# EAGLE board dev_kit_f103v4 (EAGLE 9.6.2)
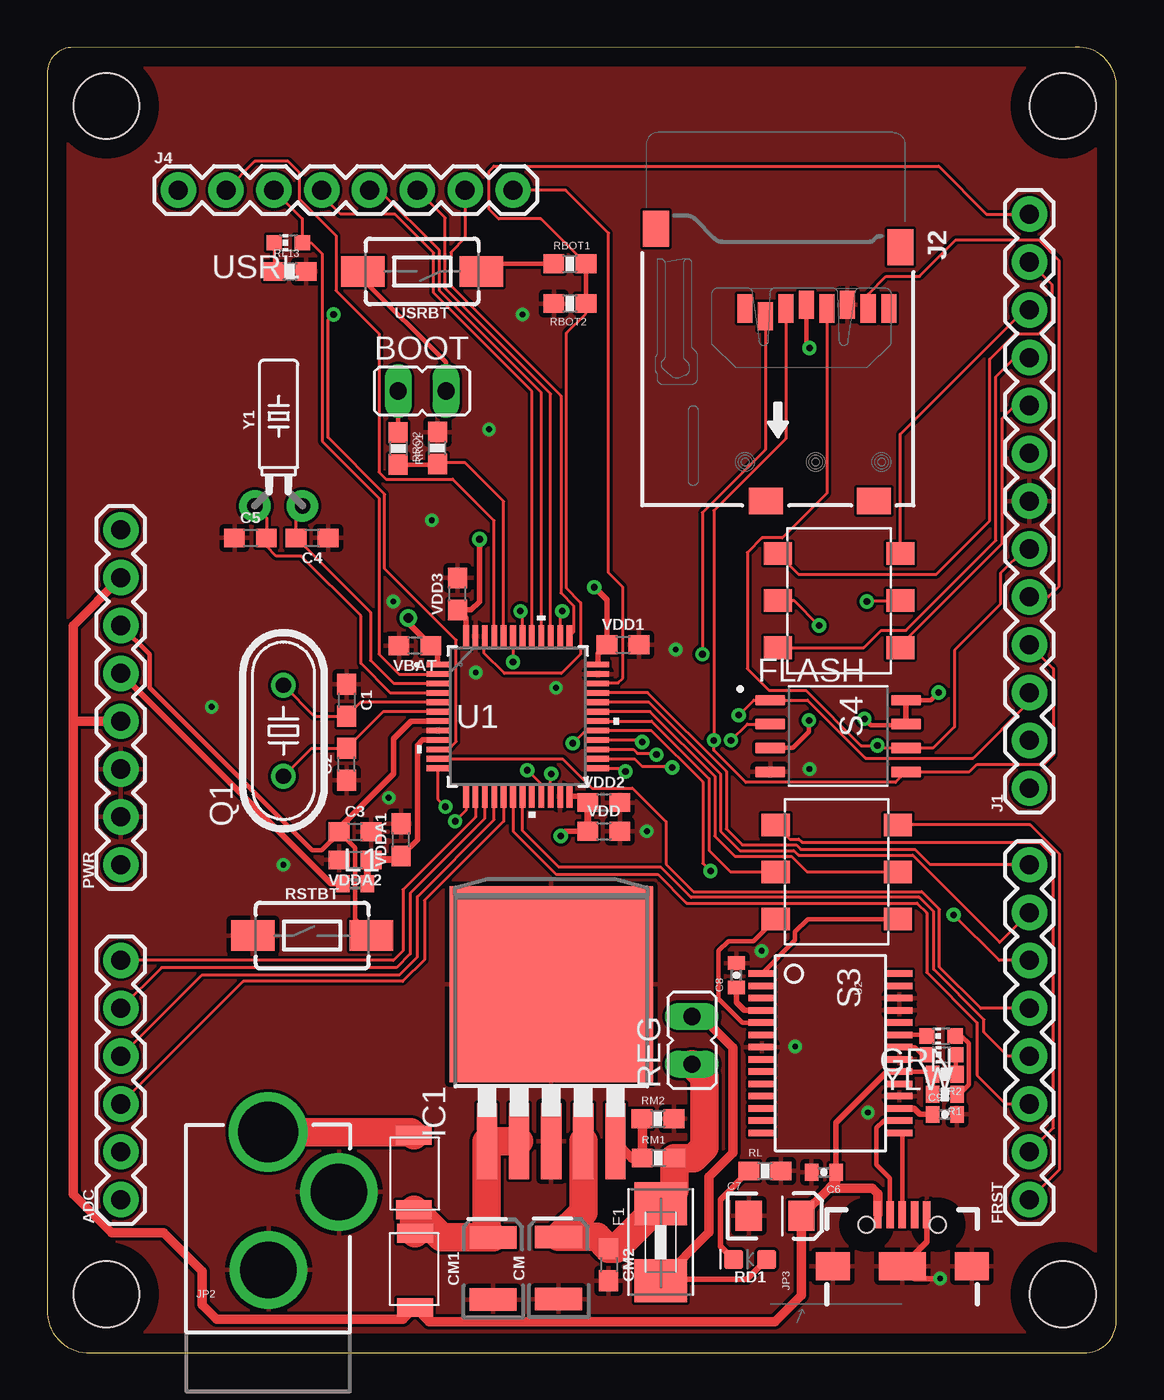
[diagram p0: board, top side]
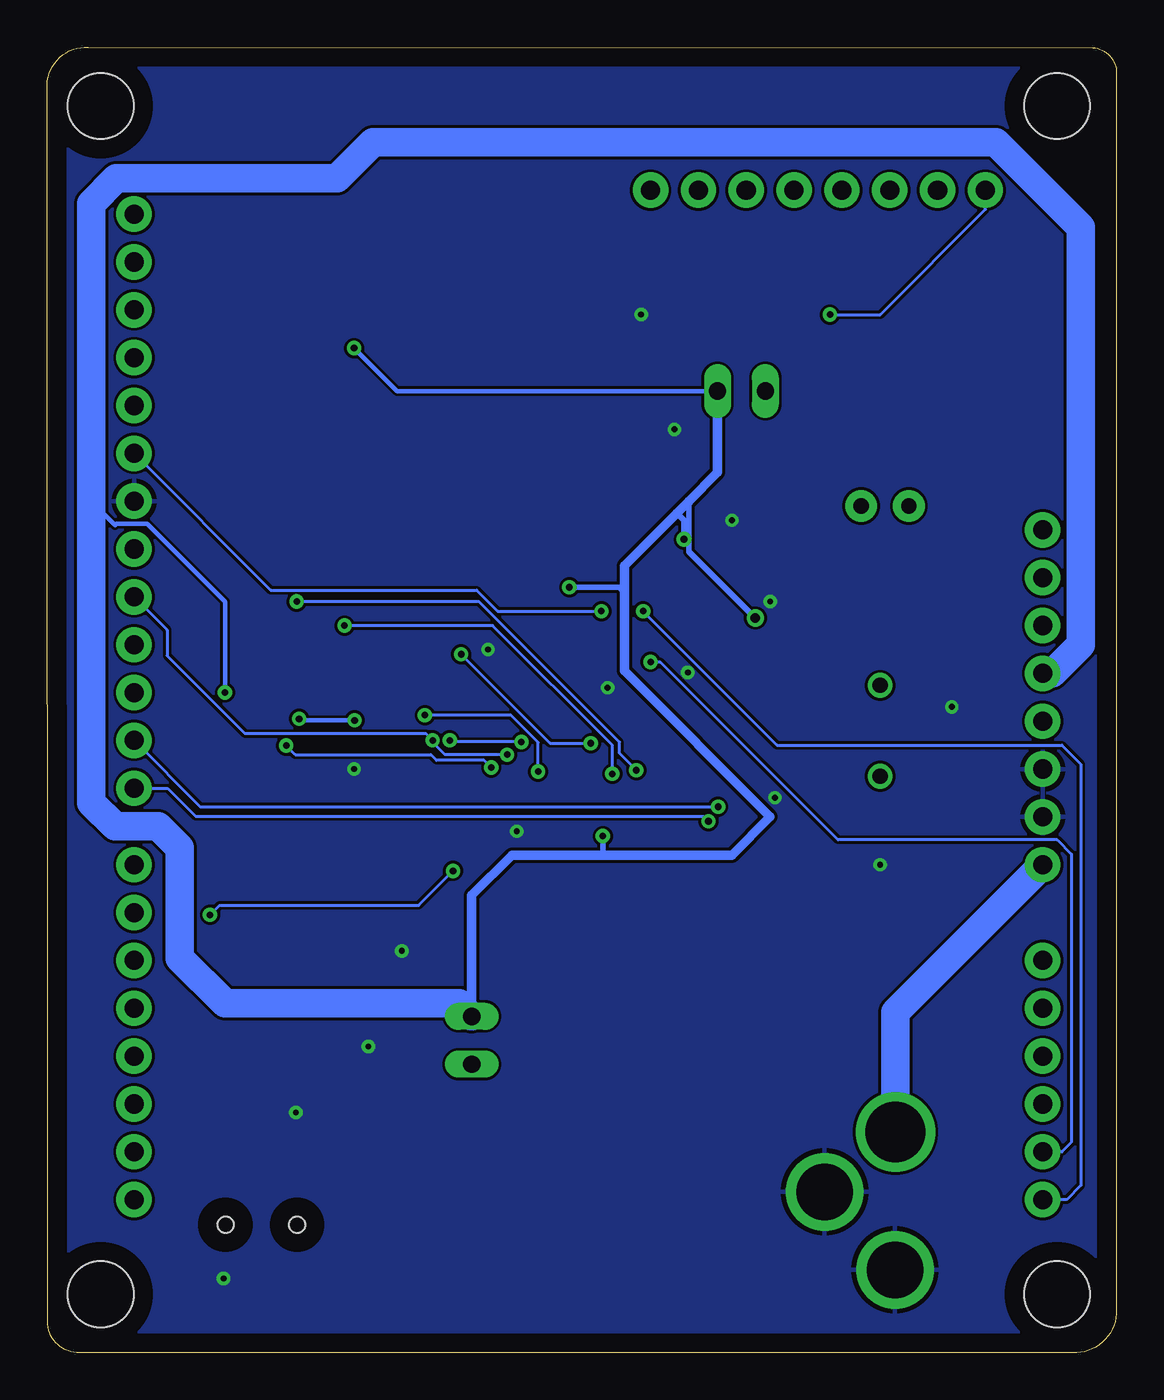
[diagram p1: board, bottom side, seen from below]

Size 56.8 x 69.33 mm. Coordinates in mm from the lower left corner, seen from the top.
Outline: 54.62,69.33 1.25,69.3 arc90 0.01,67.8 0.01,2.29 arc90 2.12,0.01 54.92,0.01 arc90 56.78,1.52 56.8,67.33 arc90 54.62,69.33
Copper layers (1*16): Top 0.035mm / dielectric 1.5mm / Bottom 0.035mm
Design rules "default": minimum track width 6mil, minimum drill 0.35mm, track to track 6mil, track to pad 6mil, pad to pad 6mil, via to via 6mil, smd to smd 6mil, copper to edge 40mil, drill to drill 6mil, minimum pad ring 10mil, minimum via ring 8mil, stop-mask expansion 4mil, vias tented up to drill 0mil, thermal gap 10mil
Net classes: 1 power: width 0.254 mm
Holes 3.5 mm at 53.96,3.11 3.16,3.11 3.16,66.2 53.96,66.2

## Footprints (pad centres in the part's own frame; a part is rotated, then mirrored left to right if it is on the bottom)
1X06 = drill 1.016 pad 1.88: 1 0,0; 2 2.54,0; 3 5.08,0; 4 7.62,0; 5 10.16,0; 6 12.7,0
JP1 = drill 0.914 long: 1 0,-1.27; 2 0,1.27
0603 = smd 1.1 x 1: 1 -0.85,0; 2 0.85,0
0402-CAP = smd 0.7 x 0.9: 1 -0.65,0; 2 0.65,0
EIA3216 = smd 1.4 x 1.6: A 1.4,0; C -1.4,0
EIA3528 = smd 1.2 x 2.5: A 1.65,0; C -1.65,0
3ASCHOOTKY = smd 1 x 1.9: IN 0.446,-1.325; OUT 4.396,-1.325
1812 = smd 2.286 x 2.794: 1 -2.046,0; 2 2.046,0
W25Q64 = smd 1.61 x 0.58: CLK 3.605,-0.635; CS -3.605,1.905; DI 3.605,-1.905; DO -3.605,0.635; GND -3.605,-1.905; H/R 3.605,0.635; VCC 3.605,1.905; WP -3.605,-0.635
1X08 = drill 1.016 pad 1.88: 1 0,0; 2 2.54,0; 3 5.08,0; 4 7.62,0; 5 10.16,0; 6 12.7,0; 7 15.24,0; 8 17.78,0
CHIP-LED0603 = smd 0.8 x 0.8: A 0,-0.75; C 0,0.75
TO263-5 = smd 1.067 x 4.039: 1 -3.404,-5.791; 2 -1.702,-5.791; 3 0,-5.791; 4 1.702,-5.791; 5 3.404,-5.791 | smd 10.8 x 10.41: 6 0,2.54
1X13 = drill 1.016 pad 1.88: 1 0,0; 2 2.54,0; 3 5.08,0; 4 7.62,0; 5 10.16,0; 6 12.7,0; 7 15.24,0; 8 17.78,0; 9 20.32,0; 10 22.86,0; 11 25.4,0; 12 27.94,0; 13 30.48,0
CON-SD-CARD_2908-05 = smd 0.8 x 1.5: 1 1.761,3.847; 2 0.669,4.253; 3 -0.423,3.847; 4 -1.515,3.644; 5 -2.607,3.847; 6 -3.7,3.644; 7 -4.792,3.847; 8 -5.884,3.847 | smd 1.397 x 1.905: GND@1 -6.5,0.6; GND@2 6.473,-0.389 | smd 1.803 x 1.397: GND@3 0.631,14.059; GND@4 -5.084,14.059
POWER_JACK_PTH_LOCK = drill 2.997 pad 4.115: GND 0.025,6.557; GNDBREAK 3.762,10.7 | drill 3.2 pad 4.115: PWR 0,13.878
USB-B-MICRO-SMD_V03 = smd 1.45 x 0.4: D+1 2.725,0; D-1 2.725,0.65; GND1 2.725,-1.3; ID1 2.725,-0.65; VBUS1 2.725,1.3 | smd 1.5 x 1.8: SHIELD1 0,3.685; SHIELD2 0,-3.685 | smd 1.5 x 2.5: SHIELD3 0,0 | hole 0.85: 2.2,1.9; 2.2,-1.9
0402 = smd 0.7 x 0.9: 1 -0.65,0; 2 0.65,0
HC49/S = drill 0.813: 1 -2.413,0; 2 2.413,0
0402-RES = smd 0.7 x 0.9: 1 -0.65,0; 2 0.65,0
0603-RES = smd 1.1 x 1: 1 -0.85,0; 2 0.85,0
LED-0603 = smd 1 x 1: A -0.877,0; C 0.877,0
TACTILE_SWITCH_SMD_6.0X3.5MM = smd 2.3 x 1.6: 1 -3.15,0; 2 3.15,0
452403012014 = smd 1.2 x 1.5: 1 -2.5,3.25; 2 0,3.25; 3 2.5,3.25; 4 -2.5,-3.25; 5 0,-3.25; 6 2.5,-3.25
LQFP48-7X7MM = smd 1.194 x 0.305: 1 -4.25,2.75; 2 -4.25,2.25; 3 -4.25,1.75; 4 -4.25,1.25; 5 -4.25,0.75; 6 -4.25,0.25; 7 -4.25,-0.25; 8 -4.25,-0.75; 9 -4.25,-1.25; 10 -4.25,-1.75; 11 -4.25,-2.25; 12 -4.25,-2.75; 25 4.25,-2.75; 26 4.25,-2.25; 27 4.25,-1.75; 28 4.25,-1.25; 29 4.25,-0.75; 30 4.25,-0.25; 31 4.25,0.25; 32 4.25,0.75; 33 4.25,1.25; 34 4.25,1.75; 35 4.25,2.25; 36 4.25,2.75 | smd 0.305 x 1.194: 13 -2.75,-4.25; 14 -2.25,-4.25; 15 -1.75,-4.25; 16 -1.25,-4.25; 17 -0.75,-4.25; 18 -0.25,-4.25; 19 0.25,-4.25; 20 0.75,-4.25; 21 1.25,-4.25; 22 1.75,-4.25; 23 2.25,-4.25; 24 2.75,-4.25; 37 2.75,4.25; 38 2.25,4.25; 39 1.75,4.25; 40 1.25,4.25; 41 0.75,4.25; 42 0.25,4.25; 43 -0.25,4.25; 44 -0.75,4.25; 45 -1.25,4.25; 46 -1.75,4.25; 47 -2.25,4.25; 48 -2.75,4.25
SSOP28DB = smd 0.348 x 1.397: 1 -4.225,-3.656; 2 -3.575,-3.656; 3 -2.925,-3.656; 4 -2.275,-3.656; 5 -1.625,-3.656; 6 -0.975,-3.656; 7 -0.325,-3.656; 8 0.325,-3.656; 9 0.975,-3.656; 10 1.625,-3.656; 11 2.275,-3.656; 12 2.925,-3.656; 13 3.575,-3.656; 14 4.225,-3.656; 15 4.225,3.656; 16 3.575,3.656; 17 2.925,3.656; 18 2.275,3.656; 19 1.625,3.656; 20 0.975,3.656; 21 0.325,3.656; 22 -0.325,3.656; 23 -0.975,3.656; 24 -1.625,3.656; 25 -2.275,3.656; 26 -2.925,3.656; 27 -3.575,3.656; 28 -4.225,3.656
CRYSTAL-PTH-2X6-CYL-KIT = drill 0.813 pad 1.676: 1 -1.27,0; 2 1.27,0

## Placement (x,y rotation side)
ADC  [1X06]  3.92,8.14 90 top
BOOT  [JP1]  19.92,51.06 270 top
C1  22pF  [0603]  15.91,34.65 270 top
C2  22pF  [0603]  15.91,31.25 90 top
C3  0.1uF  [0603]  16.36,27.67 0 top
C4  15pF  [0603]  14.08,43.27 180 top
C5  15pF  [0603]  10.8,43.27 0 top
C6  0.1uF  [0402-CAP]  41.26,9.59 180 top
C7  10uF  [EIA3216]  38.67,7.27 0 top
C8  0.1uF  [0402-CAP]  36.61,20.05 90 top
C9  0.1uF  [0402-CAP]  47.68,12.66 0 top
CM  10uF  [EIA3528]  27.16,4.51 90 top
CM1  10uF  [EIA3528]  23.68,4.48 90 top
CM2  100nF  [0603]  29.83,4.68 270 top
D1  [3ASCHOOTKY]  18.22,1.97 90 top
D2  [3ASCHOOTKY]  20.81,12 270 top
F1  [1812]  32.59,5.88 270 top
FLASH  [W25Q64]  42.02,32.75 0 top
FRST  [1X08]  52.18,8.14 90 top
GRN  [CHIP-LED0603]  47.48,16.82 90 top
IC1  [TO263-5]  26.78,17.03 0 top
J1  [1X13]  52.18,29.98 90 top
J2  CON-SD-CARD_MICROSD-2908-05  [CON-SD-CARD_2908-05]  38.82,59.29 180 top
J4  [1X08]  6.97,61.73 0 top
JP2  POWER  [POWER_JACK_PTH_LOCK]  11.74,-2.15 0 top
JP3  USB  [USB-B-MICRO-SMD_V03]  45.42,4.61 90 top
L1  BLM15HB221SN1  [0402]  16.36,24.9 0 top
PWR  [1X08]  3.92,25.92 90 top
Q1  [HC49/S]  12.55,33.03 90 top
R1  1k  [0402-RES]  47.68,13.73 180 top
R2  1k  [0402-RES]  47.68,14.79 180 top
RBOT1  330  [0603-RES]  27.77,57.82 0 top
RBOT2  10k  [0603-RES]  27.77,55.71 180 top
RD1  Red  [LED-0603]  37.34,4.96 180 top
REG  [JP1]  34.25,16.6 0 top
RL  1.5k  [0603-RES]  38.13,9.66 0 top
RL13  1k5  [0603-RES]  12.91,57.41 0 top
RM1  316  [0603-RES]  32.47,10.35 0 top
RM2  187  [0603-RES]  32.44,12.43 0 top
RRO1  10k  [0603-RES]  20.73,48.04 90 top
RRO2  330  [0603-RES]  18.65,48.02 270 top
RSTBT  MOMENTARY-SWITCH-SPST-SMD-6.0X3.5MM  [TACTILE_SWITCH_SMD_6.0X3.5MM]  14.08,22.16 0 top
S3  [452403012014]  41.94,25.54 270 top
S4  [452403012014]  42.07,39.94 270 top
U1  [LQFP48-7X7MM]  25,33.79 0 top
U2  FT232RLSSOP  [SSOP28DB]  41.61,15.91 270 top
USRBT  MOMENTARY-SWITCH-SPST-SMD-6.0X3.5MM  [TACTILE_SWITCH_SMD_6.0X3.5MM]  19.92,57.41 180 top
USRL  [CHIP-LED0603]  12.81,58.94 90 top
VBAT  100nF  [0603]  19.54,37.55 180 top
VDD  4.7uF  [0603]  29.57,27.7 0 top
VDD1  100nF  [0603]  30.59,37.6 0 top
VDD2  100nF  [0603]  29.57,29.22 0 top
VDD3  100nF  [0603]  21.8,40.29 90 top
VDDA1  1uF  [0603]  18.8,27.24 90 top
VDDA2  100nF  [0603]  16.36,26.17 180 top
Y1  32.768kHz  [CRYSTAL-PTH-2X6-CYL-KIT]  12.3,44.97 0 top
YLW  [CHIP-LED0603]  47.5,15.83 90 top

## Library data of the parts
ADC = SparkFun-Connectors; PROD_ID: CONN-08437
BOOT REG = jumper
C1-C5 = SparkFun-Capacitors; PROD_ID: CAP-07876
C6-C9 R1 R2 U2 = SparkFun
CM CM1 = SparkFun-Capacitors; PROD_ID: CAP-08063
CM2 VBAT VDD VDD1-VDD3 VDDA1 VDDA2 = SparkFun-Capacitors; PROD_ID: CAP-00810
D1 D2 = 1N4007
F1 GRN USRL YLW = adafruit
FLASH = W25Q64
FRST J4 PWR = SparkFun-Connectors; PROD_ID: CONN-08438
IC1 = MIC29302WU; AVAILABILITY: Good; DESCRIPTION: Linear Voltage Regulator IC Positive Adjustable 1 Output 3A TO-263-5; MF: Microchip Technology; MP: MIC29302WU; PACKAGE: TO-263-6 Microchip Technology; PRICE: None; PURCHASE-URL: https://pricing.snapeda.com/search/part/MIC29302WU/?ref=eda
J1 = SparkFun-Connectors
J2 = 52101-101-REV-A_v16
JP2 = SparkFun-Connectors; PROD_ID: CONN-08197; SF_ID: PRT-00119
JP3 = SparkFun-Connectors; PROD_ID: CONN-11752
L1 = inductors
Q1 = crystal; OC_FARNELL: 1667008; OC_NEWARK: unknown
RBOT1 RBOT2 RL RL13 RM1 RM2 RRO1 RRO2 = SparkFun-Resistors; PROD_ID: RES-08296
RD1 = SparkFun-LED; PROD_ID: DIO-11154
RSTBT USRBT = SparkFun-Switches; PROD_ID: SWCH-00815; SF_SKU: COM-08229
S3 S4 = step_switch
U1 = STM32F103C8T6; BUILT_BY: EMA_UL_Team; COPYRIGHT: Copyright (C) 2018 Accelerated Designs. All rights reserved; MANUFACTURER_PART_NUMBER: STM32F103C8T6; SOURCELIBRARY: Updates_to_database_2020-10-19; VENDOR: STMicroelectronics
Y1 = SparkFun-Clocks; PROD_ID: XTAL-10112

## Nets
3.3V: BOOT.2 F1.2 FLASH.H/R FLASH.VCC FLASH.WP J2.4 L1.1 PWR.5 RD1.A REG.2 U1.1 U1.24 U1.36 U1.48 USRBT.2 VBAT.1 VDD1.1 VDD2.1 VDD3.1 VDD.1
BOOT0: RRO1.1 RRO2.2 U1.44
BUTTON: J1.13 RBOT1.2 RBOT2.1 U1.46
CRX1: FRST.1 S3.1
CRX3: J1.11 S4.1
CS2: FLASH.CS J1.3 U1.25
CSCL: J1.10 S4.6
CSDA: J1.9 S4.3
CTX1: FRST.2 S3.4
CTX3: J1.12 S4.4
GND: C1.1 C2.1 C3.2 C4.1 C5.1 C6.2 C7.C C8.2 C9.2 CM1.C CM2.2 CM.C FLASH.GND IC1.3 IC1.6 J1.7 J2.6 JP2.GND JP2.GNDBREAK JP3.GND1 JP3.SHIELD1 JP3.SHIELD2 JP3.SHIELD3 PWR.2 PWR.3 RBOT2.2 RL13.2 RL.2 RM2.2 RRO1.2 RSTBT.1 U1.8 U1.23 U1.35 U1.47 U2.7 U2.18 U2.21 U2.25 U2.26 VBAT.2 VDD1.2 VDD2.2 VDD3.2 VDD.2 VDDA1.2 VDDA2.2
LED: J4.3 U1.2 USRL.A
MISO2: FLASH.DO J1.5 J2.7 U1.27
MOSI2: FLASH.DI J1.4 J2.3 U1.28
N$1: CM1.A D1.OUT D2.OUT IC1.1 IC1.2
N$2: CM2.1 CM.A F1.1 IC1.4 REG.1 RM1.2
N$3: BOOT.1 RRO2.1
N$4: RL13.1 USRL.C
N$5: RBOT1.1 USRBT.1
N$6: GRN.A R1.1
N$7: R2.1 YLW.A
N$8: C9.1 U2.17
N$20: IC1.5 RM1.1 RM2.1
N$35: RD1.C RL.1
NRST: C3.1 PWR.6 RSTBT.2 U1.7
OSC32_IN: C4.2 U1.3 Y1.2
OSC32_OUT: C5.2 U1.4 Y1.1
OSC_IN: C1.2 Q1.2 U1.5
OSC_OUT: C2.2 Q1.1 U1.6
PA0: J4.1 U1.10
PA1: FRST.5 U1.11
PA4: ADC.6 U1.14
PA5: ADC.5 U1.15
PA6: ADC.4 U1.16
PA7: ADC.3 U1.17
PA8: FRST.6 J2.2 U1.29
PA11: FRST.7 U1.32
PA12: FRST.8 U1.33
PA15: J1.8 U1.38
PB0: FRST.3 U1.18
PB1: FRST.4 U1.19
PB3: J4.6 U1.39
PB4: J4.5 U1.40
PB5: J4.4 U1.41
PB8: J4.2 U1.45
RX1: S3.2 U1.31
RX2: J1.1 U1.13
RX3/SDA2: S4.5 U1.22
RXLED: U2.22 YLW.C
SCK2: FLASH.CLK J1.6 J2.5 U1.26
SCL1: ADC.1 U1.42
SDA1: ADC.2 U1.43
SWCLK: J4.7 U1.37
SWDIO: J4.8 U1.34
TX1: S3.5 U1.30
TX2: J1.2 U1.12
TX3/SCL2: S4.2 U1.21
TXLED: GRN.C U2.23
URX1: S3.3 U2.1
USB_D+: JP3.D+1 U2.15
USB_D-: JP3.D-1 U2.16
UTX1: S3.6 U2.5
V_USB: C6.1 C7.A D1.IN JP3.VBUS1 PWR.4 PWR.7 R1.2 R2.2 U2.20
VCC: C8.1 U2.4
VDDA: L1.2 U1.9 VDDA1.1 VDDA2.1
VIN: D2.IN JP2.PWR PWR.1

## Tracks (layer width: path | path; a pad name or v marks a point on that pad's centre or on a via)
3.3V  (via drill 0.35, 0.38, 0.51)
  Top 0.229: BOOT.2 21.19,52.59 16.77,57.01 USRBT.2 | v40.49,53.35 40.33,53.51 J2.4 | FLASH.VCC 46.95,34.66 v47.35,35.06 | FLASH.WP 39.61,32.12 40.47,32.98 v40.47,33.59 | v43.42,33.66 43.75,33.33 45.57,33.33 FLASH.H/R
  Top 0.305: F1.2 32.67,3.91 37.17,3.91 RD1.A | U1.24 28.4,29.54 VDD2.1 | U1.36 29.25,37.11 VDD1.1 29.74,39.98 v29.06,40.65 | U1.48 22.25,38.99 VDD3.1 22.52,39.44 22.97,39.89 v22.97,43.19 | U1.1 20.75,37.19 VBAT.1 19.18,38.76 v19.18,39.02 | PWR.5 15.09,24.9 L1.1 | FLASH.VCC FLASH.H/R | v27.29,27.44 27.54,27.7 VDD.1
  Top 0.381: VDD.1 VDD2.1
  Top 0.508: F1.2 35.16,6.4 35.16,9.35 36.43,10.62 36.43,16.19 34.75,17.87 REG.2
  Bottom 0.229: BOOT.2 38.21,51.06 v40.49,53.35 | v47.35,35.06 47.35,39.89 51.48,44.01 53.14,44.01 53.19,43.95 54.46,45.22 | v43.42,33.66 43.34,33.59 v40.47,33.59
  Bottom 0.305: v22.97,43.19 22.97,44.21 23.35,44.59 | 27.29,26.43 v27.29,27.44 | 22.71,45.22 22.71,42.55 v19.18,39.02 | 26.14,40.4 26.4,40.65 v29.06,40.65
  Bottom 0.508: REG.2 34.25,24.29 32.11,26.43 27.29,26.43 20.43,26.43 18.4,28.46 26.14,36.2 26.14,40.4 26.14,41.79 23.35,44.59 22.71,45.22 21.19,46.75 BOOT.2
  Bottom 1.524: REG.2 34.93,18.55 47.35,18.55 49.77,20.96 49.77,26.81 50.91,27.95 53.19,27.95 54.46,29.22 54.46,45.22 54.46,61.02 53.13,62.35 41.4,62.35 39.48,64.27 6.41,64.27 1.89,59.75 1.89,37.6 3.41,36.08 PWR.5
BOOT0
  Top 0.152: U1.44 24.25,45.21 22.21,47.25 20.8,47.25 RRO1.1
  Top 0.229: RRO2.2 20.71,47.17 RRO1.1
BUTTON
  Top 0.152: RBOT2.1 28.62,55.18 27.59,54.15 27.59,40.59 28.34,39.84 28.34,37.09 27.32,36.08 24.29,36.08 23.22,37.14 23.22,38.01 U1.46 | RBOT1.2 26.23,60.21 23.98,60.21 23.48,60.72 23.48,62.75 23.73,63 47.35,63 49.9,60.46 J1.13
  Top 0.229: RBOT1.2 RBOT2.1
CRX1
  Top 0.152: FRST.1 53.75,9.71 53.75,26.5 52.22,28.04 S3.1
CRX3
  Top 0.152: S4.1 45.32,48.78 51.92,55.38 J1.11
CS2  (via drill 0.35)
  Top 0.152: U1.25 30.52,31.04 30.71,30.85 v30.72,30.86 | v36.74,33.86 37.53,34.66 FLASH.CS 40.39,34.66 43.47,31.58 49.19,31.58 52.18,34.57 J1.3
  Bottom 0.152: v30.72,30.86 30.72,32.41 32.17,33.86 v36.74,33.86
CSCL
  Top 0.152: S4.6 43.38,37.44 44.3,38.36 45.63,38.36 50.4,43.14 50.4,51.83 51.41,52.84 J1.10
CSDA
  Top 0.152: J1.9 51.41,50.3 50.73,49.62 50.73,42.99 45.32,37.57 S4.3
CTX1
  Top 0.152: S3.4 39.45,27.28 39.92,27.28 40.08,27.11 52.71,27.11 53.45,26.37 53.45,11.95 FRST.2
CTX3
  Top 0.152: S4.4 39.94,41.32 47.21,41.32 50.07,44.18 50.07,52.77 51.42,54.11 52.69,54.11 53.37,54.8 53.37,56.72 J1.12
GND  (via drill 0.3)
  Top 0.305: v47.43,3.95 46.08,3.95 JP3.SHIELD3 46.72,5.91 JP3.GND1
  other vias: 8.74,34.3 31.86,27.7 40.49,31 37.95,21.35 39.73,16.27 25.25,55.13 23.48,49.03 22.76,36.13 43.59,12.76 20.43,44.21 27.03,35.32 12.55,25.92 33.38,37.35 18.14,29.47 18.4,39.89
  pour Top: -1.16,70.62 57.92,70.62 57.92,-4.33 -1.16,-4.33
  pour Bottom: -2.43,71.64 -2.43,-6.16 59.32,-6.16 59.32,71.64
LED
  Top 0.152: J4.3 13.56,60.22 USRL.A 14.03,58.94 14.61,58.35 14.61,48.41 17.63,45.39 17.63,37.09 18.69,36.04 U1.2
MISO2  (via drill 0.35)
  Top 0.152: U1.27 31.14,32.04 31.35,31.83 32.3,31.83 v32.37,31.76 | v36.32,32.52 37.19,33.39 FLASH.DO | J1.5 53.19,40.14 53.73,40.67 53.73,58.02 52.66,59.09 48.26,59.09 46.34,57.16 44.56,57.16 43.61,56.21 J2.7
  Bottom 0.152: v32.37,31.76 35.67,31.76 36.32,32.41 v36.32,32.52 36.68,32.88 46.29,32.88 50.43,37.01 50.43,38.38 J1.5
MOSI2  (via drill 0.35)
  Top 0.152: U1.28 31.5,32.54 v31.6,32.43 | J1.4 53.45,36.33 53.45,31.74 52.96,31.25 49.38,31.25 48.98,30.85 FLASH.DI 45.06,30.29 37.12,30.29 35.41,31.99 v35.41,32.52 35.41,44.71 39.24,48.54 J2.3
  Bottom 0.152: v31.6,32.43 35.33,32.43 v35.41,32.52
N$1
  Top 1.524: D1.OUT 19.48,6.42 D2.OUT 20.96,6.13 CM1.A 23.35,6.46 23.35,11.21 IC1.1 IC1.2
N$2
  Top 1.524: IC1.4 28.48,7.48 CM.A 29.2,6.16 CM2.1 30.21,5.53 F1.1 33.32,8.65 RM1.2 34.32,10.35 34.91,10.93 34.91,14.67 REG.1
N$3
  Top 0.229: BOOT.1 RRO2.1
N$4
  Top 0.152: USRL.C RL13.1
N$5
  Top 0.229: USRBT.1 23.48,57.82 RBOT1.1
N$6
  Top 0.229: GRN.A 48.57,16.82 48.95,16.44 48.95,14.24 48.44,13.73 R1.1
N$7
  Top 0.229: YLW.A 48.28,15.81 48.28,14.84 R2.1
N$8
  Top 0.305: U2.17 46.04,12.98 46.36,12.66 C9.1
N$20
  Top 0.508: RM2.1 31.62,12.43 RM1.1 31.07,10.35 IC1.5
N$35
  Top 0.305: RL.1 35.76,8.14 35.76,5.67 RD1.C
NRST
  Top 0.229: RSTBT.2 16.36,23.02 16.36,26.82 C3.1 15.51,27.6 14.6,26.68 14.08,26.68 5.44,35.32 5.44,37.09 PWR.6
  Top 0.305: U1.7 19.34,33.54 18.4,32.6 18.4,30.74 15.51,27.86 C3.1
OSC32_IN
  Top 0.152: Y1.2 13.23,44.63 C4.2 17.18,39.32 17.18,36.77 18.4,35.54 U1.3
OSC32_OUT
  Top 0.152: Y1.1 11.65,44.35 C5.2 11.65,42.82 12.17,42.3 13.49,42.3 16.67,39.13 16.67,36.61 18.24,35.03 U1.4
OSC_IN
  Top 0.152: Q1.2 14.19,33.81 C1.2 16.64,34.54 U1.5
OSC_OUT
  Top 0.152: Q1.1 14.04,32.1 C2.2 17.85,34.04 U1.6
PA0  (via drill 0.35)
  Top 0.152: U1.10 21.32,32.03 21.73,32.45 21.73,37.84 17.94,41.63 17.94,45.58 14.92,48.6 14.92,54.83 v15.22,55.13
  Bottom 0.152: v15.22,55.13 12.55,55.13 6.97,60.72 J4.1
PA1
  Top 0.152: U1.11 27.38,31.54 28.94,29.99 31.09,29.99 32.87,28.2 32.87,25.95 34.33,24.5 46.46,24.5 47.4,23.55 47.4,20.49 49.59,18.3 FRST.5
PA4
  Top 0.152: U1.14 22.75,28.44 18.9,24.6 18.9,21.35 18.4,20.84 ADC.6
PA5
  Top 0.152: U1.15 23.23,29.52 23.23,28.35 19.29,24.41 19.29,21.19 18.55,20.46 6.08,20.46 ADC.5
PA6
  Top 0.152: ADC.4 8.24,20.08 18.71,20.08 19.67,21.03 19.67,24.23 23.75,28.31 U1.16
PA7
  Top 0.152: U1.17 24.25,28.22 20.05,24.02 20.05,20.87 18.9,19.72 10.42,19.72 ADC.3
PA8  (via drill 0.35)
  Top 0.152: v35.24,25.59 34.83,25.99 34.83,30.31 32.1,33.04 U1.29 28.59,33.04 v27.92,32.37 | J2.2 38.15,47.96 34.81,44.61 v34.81,37.09 | FRST.6 50.57,20.84 v48.15,23.26
  Bottom 0.152: v48.15,23.26 47.64,23.76 37.06,23.76 v35.24,25.59 | v34.81,37.09 30.08,32.37 v27.92,32.37
PA11
  Top 0.152: U1.32 29.26,34.55 31.96,34.55 35.77,30.74 35.77,27.7 36.8,26.67 39.66,26.67 39.91,26.43 45.98,26.43 50.6,21.8 FRST.7
PA12
  Top 0.152: U1.33 29.26,35.05 31.89,35.05 36.07,30.87 36.07,27.82 36.92,26.97 39.79,26.97 40.03,26.73 46.1,26.73 46.92,25.92 FRST.8
PA15  (via drill 0.35)
  Top 0.152: v27.36,39.38 27.25,39.27 U1.38
  Bottom 0.152: v27.36,39.38 32.87,39.38 33.98,40.49 44.92,40.49 J1.8
PB0
  Top 0.152: U1.18 24.75,27.69 27.03,25.41 32.44,25.41 33.97,23.89 46.2,23.89 46.72,23.37 46.72,20.2 49.38,17.54 49.38,14.74 50.91,13.22 FRST.3
PB1
  Top 0.152: FRST.4 51.04,15.76 49.77,17.03 49.77,17.69 47.1,20.36 47.1,23.42 46.33,24.19 34.2,24.19 32.6,25.79 27.19,25.79 25.25,27.73 U1.19
PB3
  Top 0.152: U1.39 26.75,50.91 21.14,56.53 21.14,60.26 J4.6
PB4
  Top 0.152: U1.40 26.25,50.98 20.83,56.4 20.83,58.53 17.63,61.73 J4.5
PB5
  Top 0.152: U1.41 25.75,51.05 20.53,56.27 20.53,58.4 18.47,60.46 15.6,60.46 14.59,61.48 J4.4
PB8
  Top 0.152: U1.45 23.75,44.19 21.55,46.39 18.01,46.39 17.63,46.76 17.63,54.11 15.35,56.4 15.35,59.32 13.42,61.25 13.42,62.65 12.81,63.26 11.03,63.26 J4.2
RX1
  Top 0.152: U1.31 29.26,34.05 32.03,34.05 35.47,30.62 35.47,27.44 36.54,26.37 39.54,26.37 40.37,25.54 S3.2
RX2  (via drill 0.35)
  Top 0.152: U1.13 22.25,28.8 v21.68,28.23
  Bottom 0.152: v21.68,28.23 21.93,28.48 48.9,28.48 50.4,29.98 J1.1
RX3/SDA2  (via drill 0.35)
  Top 0.152: U1.22 26.75,30.72 v26.78,30.74 | v41,38.62 39.68,39.94 S4.5
  Bottom 0.152: v26.78,30.74 26.78,32.27 33.13,38.62 v41,38.62
RXLED
  Top 0.229: U2.22 46.09,16.23 46.49,15.83 YLW.C
SCK2  (via drill 0.35)
  Top 0.152: U1.26 31.21,31.54 31.6,31.15 33.13,31.15 v33.21,31.08 | J1.6 51.92,42.68 50.65,41.41 50.65,39.76 48.19,37.29 48.19,33.23 47.07,32.12 FLASH.CLK 44.23,32.12 v44.1,32.24 43.24,32.24 40.31,35.17 38.35,35.17 37.19,36.33 37.19,42.48 37.97,43.27 39.05,43.27 41.43,45.64 J2.5
  Bottom 0.152: v33.21,31.08 33.59,31.45 36.11,31.45 36.42,31.76 43.62,31.76 v44.1,32.24
SCL1  (via drill 0.35)
  Top 0.152: U1.42 25.25,39.27 v25.14,39.38
  Bottom 0.152: v25.14,39.38 18.03,32.27 2.9,32.27 1.89,31.25 1.89,27.44 1.89,27.19 1.89,8.9 2.65,8.14 ADC.1
SDA1  (via drill 0.35)
  Top 0.152: U1.43 v24.75,36.69 v24.75,36.68
  Bottom 0.152: v24.75,36.68 24.24,36.68 14.79,27.24 3.16,27.24 2.39,26.47 2.39,11.19 2.9,10.68 ADC.2
SWCLK
  Top 0.152: J4.7 22.21,59.19 21.44,58.43 21.44,56.65 27.29,50.81 27.29,40.34 27.97,39.66 27.97,38.26 U1.37
SWDIO
  Top 0.152: U1.34 29.28,35.57 30.33,35.57 30.59,35.82 30.59,40.65 29.83,41.41 29.83,59.45 27.54,61.73 J4.8
TX1
  Top 0.152: U1.30 32.11,33.54 35.16,30.49 35.16,26.68 36.3,25.54 S3.5
TX2  (via drill 0.35)
  Top 0.152: U1.12 20.75,29.41 v21.16,29
  Bottom 0.152: v21.16,29 48.66,29 J1.2
TX3/SCL2  (via drill 0.35)
  Top 0.152: U1.21 26.25,30.19 v25.51,30.93 | v43.54,39.89 43.59,39.94 S4.2
  Bottom 0.152: v25.51,30.93 26.4,31.82 26.4,32.43 33.86,39.89 v43.54,39.89
TXLED
  Top 0.229: U2.23 46.67,16.88 GRN.C
URX1
  Top 0.229: U2.1 39.73,21.91 39.73,22.36 40.41,23.04 S3.3
USB_D+
  Top 0.229: U2.15 45.42,11.53 JP3.D+1
USB_D-
  Top 0.229: U2.16 44.44,12.33 44.05,11.95 44.05,9.99 44.77,9.27 JP3.D-1
UTX1
  Top 0.229: S3.6 37.51,21.85 36.18,21.85 35.67,21.35 35.67,18.81 36.94,17.53 U2.5
V_USB
  Top 0.229: U2.20 46.89,14.93 R2.2
  Top 0.305: U2.20 44.62,14.94 41.91,12.23 C6.1 | R2.2 R1.2
  Top 0.508: 41.54,8.75 41.91,9.11 C6.1 | JP3.VBUS1 44.12,8.45 43.82,8.75 41.54,8.75 | 1.38,33.54 1.38,38.62 PWR.7 | 1.38,33.54 1.38,8.42 3.42,6.37 6.19,6.37 8.24,4.33 8.24,2.55 9,1.79 18.92,1.79 D1.IN 20.29,1.66 38.67,1.66 40.07,3.06 C7.A 41.54,8.75 | PWR.4 1.38,33.54
VCC
  Top 0.305: U2.4 37.05,18.18 36.61,18.63 C8.1
VDDA
  Top 0.305: VDDA1.1 19.67,27.25 19.67,32.27 19.94,32.54 U1.9
  Top 0.381: L1.2 17.01,25.97 VDDA2.1 18.59,26.17 VDDA1.1
VIN
  Top 1.524: JP2.PWR 19.31,11.73 D2.IN
  Bottom 1.524: PWR.1 11.74,18.09 JP2.PWR